# EAGLE board p8x-led-card-full (EAGLE 9.6.2)
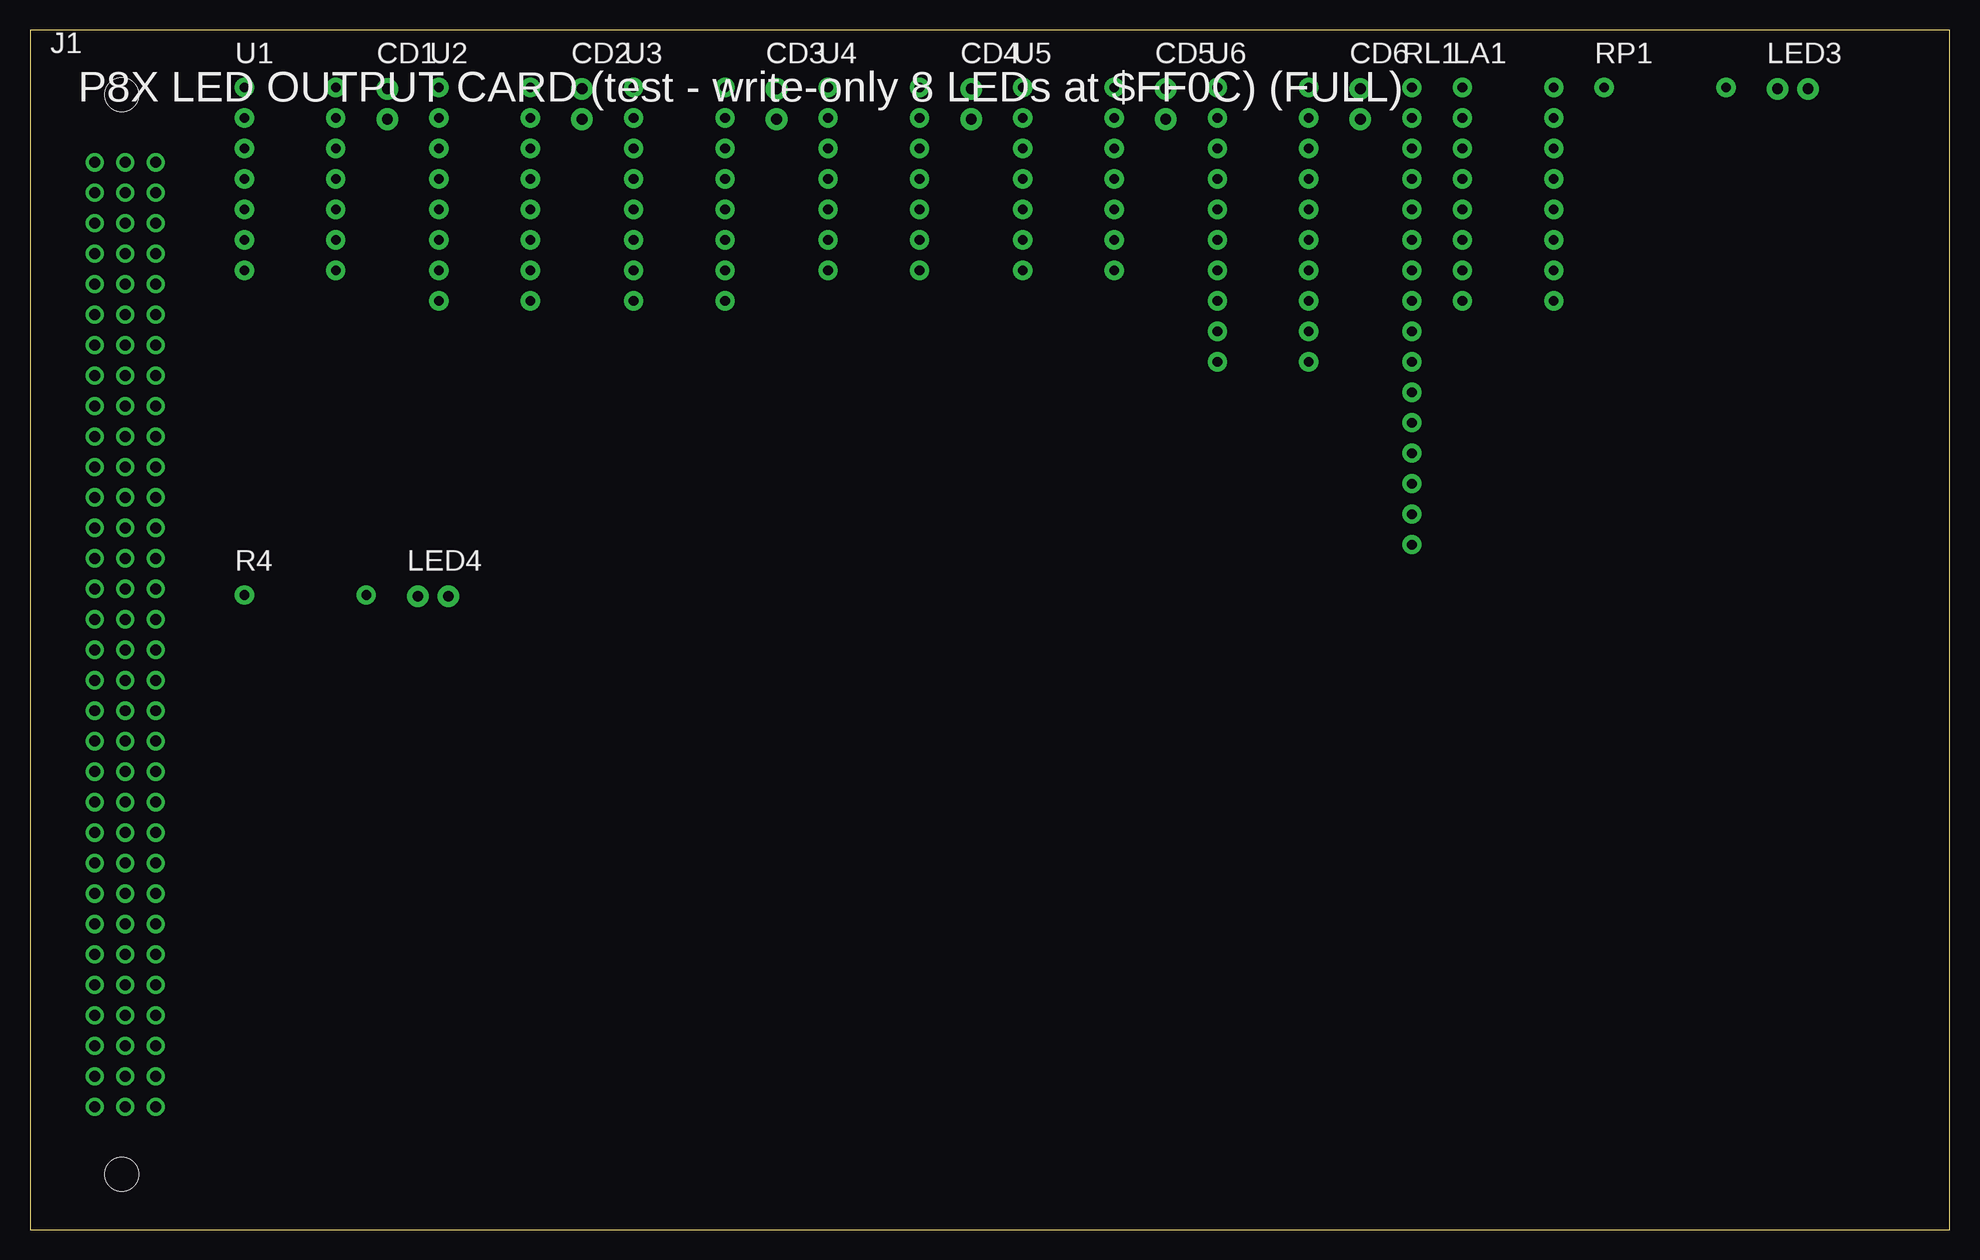
[diagram p0: board, top side]
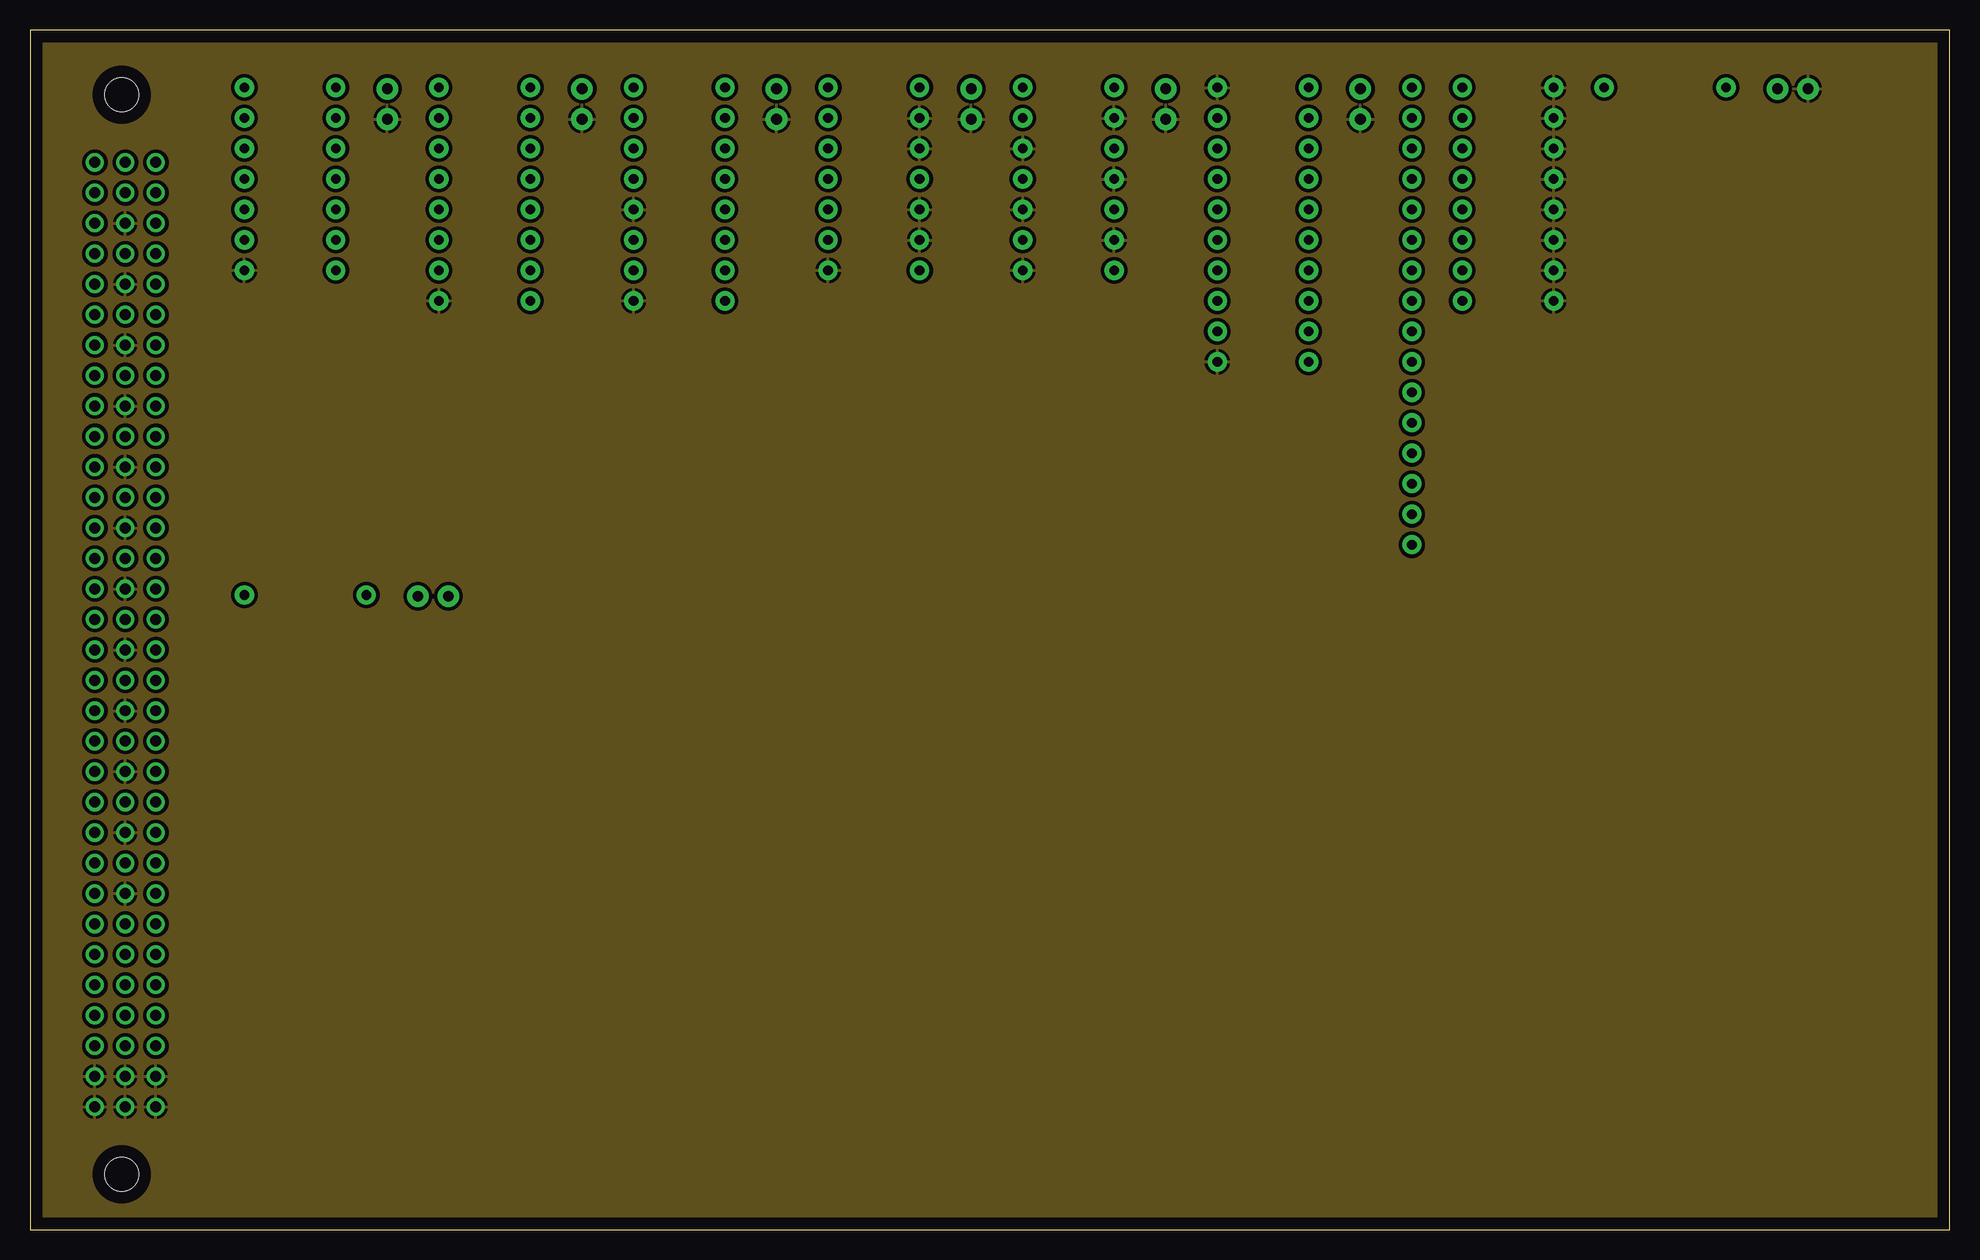
[diagram p1: board, inner layer Route2]
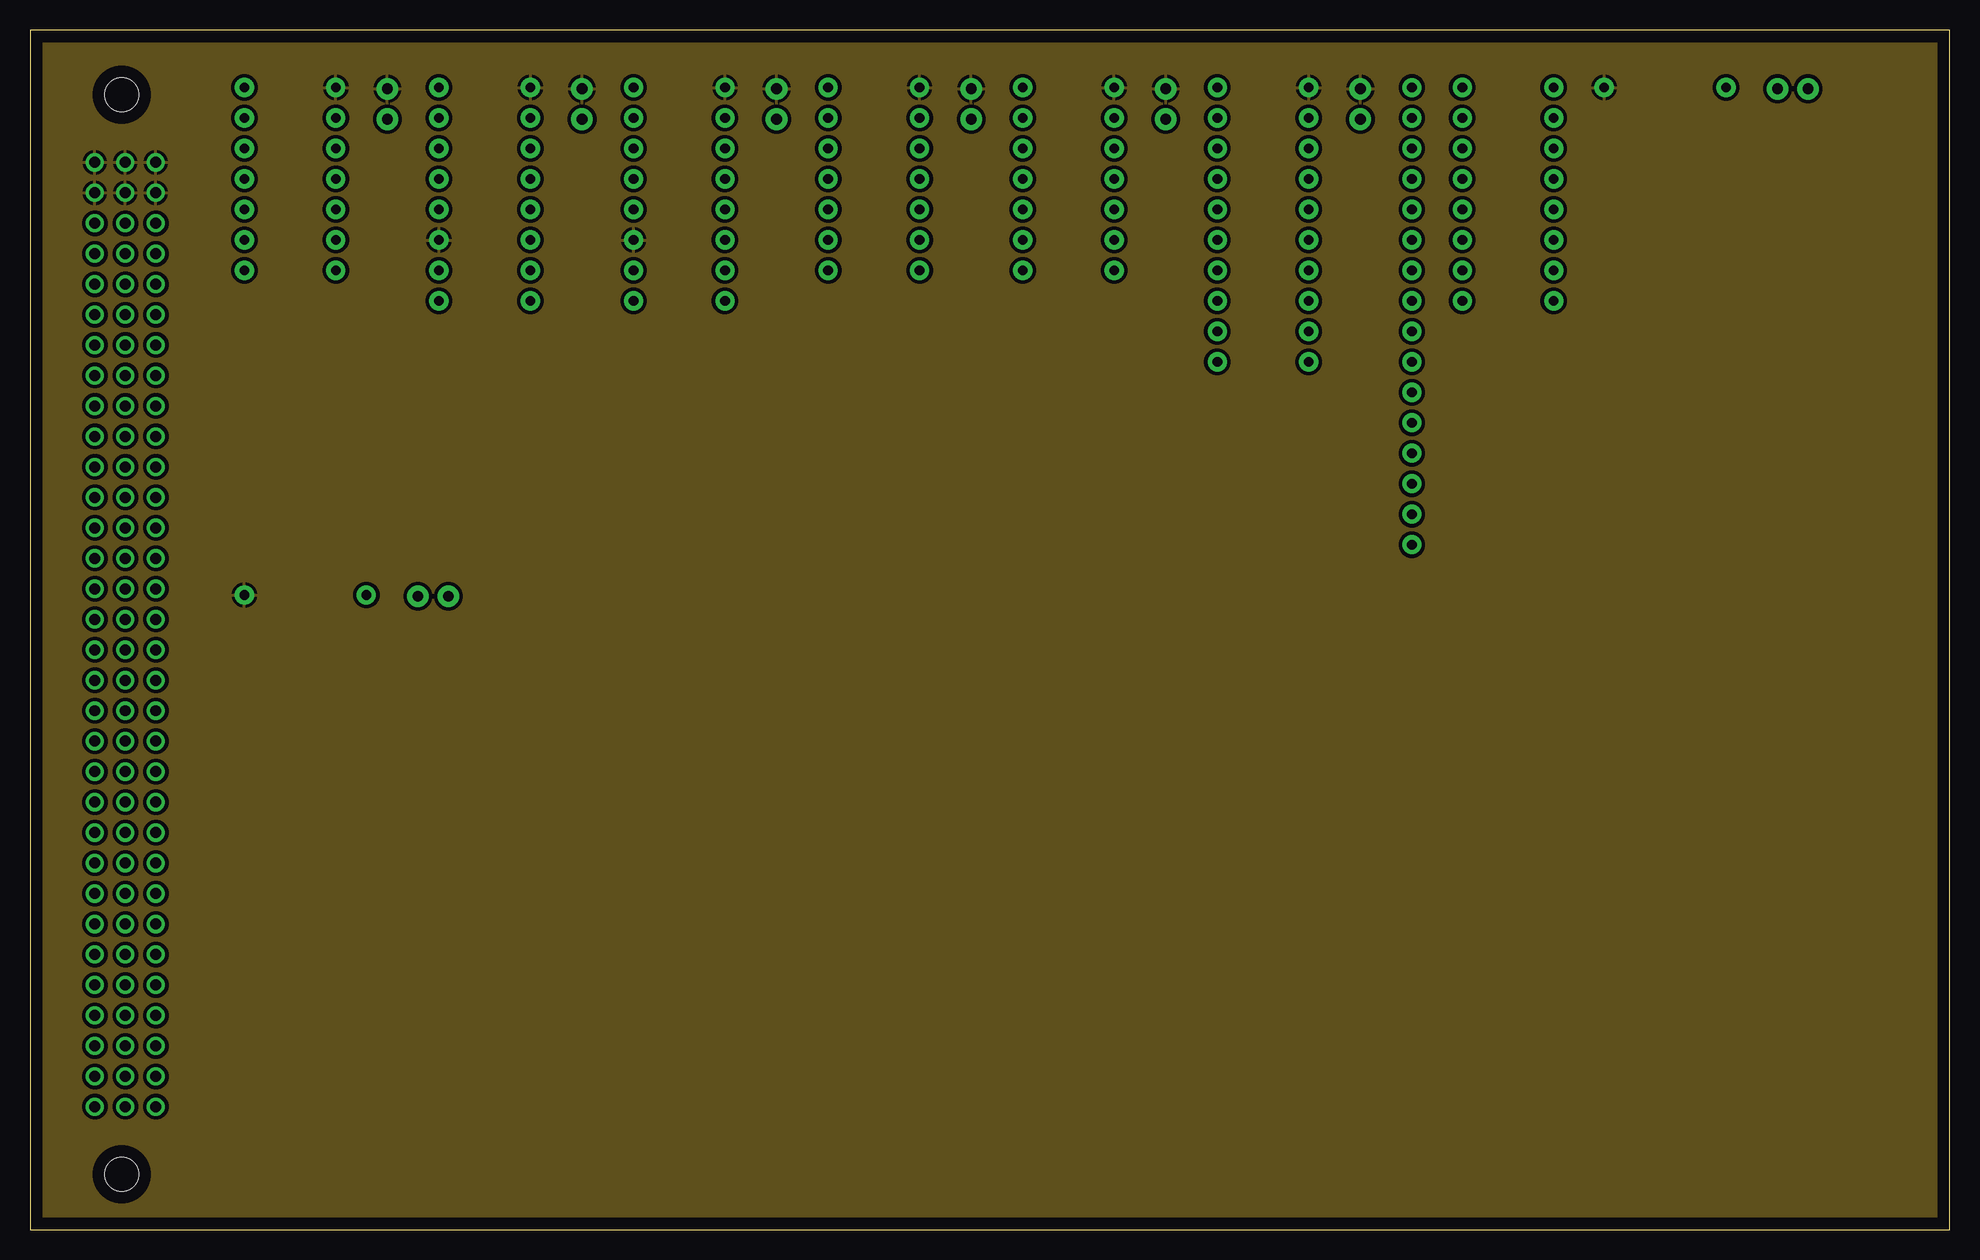
[diagram p2: board, inner layer Route15]

Size 160 x 100 mm. Coordinates in mm from the lower left corner, seen from the top.
Outline: 0,0 160,0 160,100 0,100 0,0
Copper layers (1*2*15*16): Top / Route2 / Route15 / Bottom

## Footprints (pad centres in the part's own frame; a part is rotated, then mirrored left to right if it is on the bottom)
C_DISC1 = drill 0.9 pad 1.8: 1 0,0; 2 0,-2.54
MABC96R = drill 0.914 pad 1.524: A1 -2.54,39.37; A2 -2.54,36.83; A3 -2.54,34.29; A4 -2.54,31.75; A5 -2.54,29.21; A6 -2.54,26.67; A7 -2.54,24.13; A8 -2.54,21.59; A9 -2.54,19.05; A10 -2.54,16.51; A11 -2.54,13.97; A12 -2.54,11.43; A13 -2.54,8.89; A14 -2.54,6.35; A15 -2.54,3.81; A16 -2.54,1.27; A17 -2.54,-1.27; A18 -2.54,-3.81; A19 -2.54,-6.35; A20 -2.54,-8.89; A21 -2.54,-11.43; A22 -2.54,-13.97; A23 -2.54,-16.51; A24 -2.54,-19.05; A25 -2.54,-21.59; A26 -2.54,-24.13; A27 -2.54,-26.67; A28 -2.54,-29.21; A29 -2.54,-31.75; A30 -2.54,-34.29; A31 -2.54,-36.83; A32 -2.54,-39.37; B1 0,39.37; B2 0,36.83; B3 0,34.29; B4 0,31.75; B5 0,29.21; B6 0,26.67; B7 0,24.13; B8 0,21.59; B9 0,19.05; B10 0,16.51; B11 0,13.97; B12 0,11.43; B13 0,8.89; B14 0,6.35; B15 0,3.81; B16 0,1.27; B17 0,-1.27; B18 0,-3.81; B19 0,-6.35; B20 0,-8.89; B21 0,-11.43; B22 0,-13.97; B23 0,-16.51; B24 0,-19.05; B25 0,-21.59; B26 0,-24.13; B27 0,-26.67; B28 0,-29.21; B29 0,-31.75; B30 0,-34.29; B31 0,-36.83; B32 0,-39.37; C1 2.54,39.37; C2 2.54,36.83; C3 2.54,34.29; C4 2.54,31.75; C5 2.54,29.21; C6 2.54,26.67; C7 2.54,24.13; C8 2.54,21.59; C9 2.54,19.05; C10 2.54,16.51; C11 2.54,13.97; C12 2.54,11.43; C13 2.54,8.89; C14 2.54,6.35; C15 2.54,3.81; C16 2.54,1.27; C17 2.54,-1.27; C18 2.54,-3.81; C19 2.54,-6.35; C20 2.54,-8.89; C21 2.54,-11.43; C22 2.54,-13.97; C23 2.54,-16.51; C24 2.54,-19.05; C25 2.54,-21.59; C26 2.54,-24.13; C27 2.54,-26.67; C28 2.54,-29.21; C29 2.54,-31.75; C30 2.54,-34.29; C31 2.54,-36.83; C32 2.54,-39.37 | hole 2.794: -0.3,45; -0.3,-45
DIP16 = drill 0.813 pad 1.6: 1 0,0; 2 0,-2.54; 3 0,-5.08; 4 0,-7.62; 5 0,-10.16; 6 0,-12.7; 7 0,-15.24; 8 0,-17.78; 9 7.62,-17.78; 10 7.62,-15.24; 11 7.62,-12.7; 12 7.62,-10.16; 13 7.62,-7.62; 14 7.62,-5.08; 15 7.62,-2.54; 16 7.62,0
LED5 = drill 0.9 pad 1.8: 1 2.54,0; 2 0,0
R_AXIAL = drill 0.8 pad 1.6: 1 0,0; 2 10.16,0
SIP16 = drill 0.8 pad 1.6: 1 0,-2.54; 2 0,-5.08; 3 0,-7.62; 4 0,-10.16; 5 0,-12.7; 6 0,-15.24; 7 0,-17.78; 8 0,-20.32; 9 0,-22.86; 10 0,-25.4; 11 0,-27.94; 12 0,-30.48; 13 0,-33.02; 14 0,-35.56; 15 0,-38.1; 16 0,-40.64
DIP14 = drill 0.813 pad 1.6: 1 0,0; 2 0,-2.54; 3 0,-5.08; 4 0,-7.62; 5 0,-10.16; 6 0,-12.7; 7 0,-15.24; 8 7.62,-15.24; 9 7.62,-12.7; 10 7.62,-10.16; 11 7.62,-7.62; 12 7.62,-5.08; 13 7.62,-2.54; 14 7.62,0
DIP20 = drill 0.813 pad 1.6: 1 0,0; 2 0,-2.54; 3 0,-5.08; 4 0,-7.62; 5 0,-10.16; 6 0,-12.7; 7 0,-15.24; 8 0,-17.78; 9 0,-20.32; 10 0,-22.86; 11 7.62,-22.86; 12 7.62,-20.32; 13 7.62,-17.78; 14 7.62,-15.24; 15 7.62,-12.7; 16 7.62,-10.16; 17 7.62,-7.62; 18 7.62,-5.08; 19 7.62,-2.54; 20 7.62,0

## Placement (x,y rotation side)
CD1  100nF  [C_DISC1]  29.79,95.1 0 top
CD2  100nF  [C_DISC1]  46.01,95.1 0 top
CD3  100nF  [C_DISC1]  62.23,95.1 0 top
CD4  100nF  [C_DISC1]  78.45,95.1 0 top
CD5  100nF  [C_DISC1]  94.67,95.1 0 top
CD6  100nF  [C_DISC1]  110.89,95.1 0 top
J1  MABC96R  [MABC96R]  7.94,49.6 0 top
LA1  8-LED BAR  [DIP16]  119.39,95.2 0 top
LED3  GRN  [LED5]  145.67,95.1 0 top
LED4  YEL  [LED5]  32.33,52.8 0 top
R4  1K  [R_AXIAL]  17.87,52.9 0 top
RL1  8x330R  [SIP16]  115.19,97.74 0 top
RP1  1K  [R_AXIAL]  131.21,95.2 0 top
U1  74HCT30  [DIP14]  17.87,95.2 0 top
U2  74HCT138  [DIP16]  34.09,95.2 0 top
U3  74HCT138  [DIP16]  50.31,95.2 0 top
U4  74HCT32  [DIP14]  66.53,95.2 0 top
U5  74HCT14  [DIP14]  82.75,95.2 0 top
U6  74HCT374  [DIP20]  98.97,95.2 0 top

## Library data of the parts
CD1-CD6 J1 LA1 LED3 LED4 R4 RL1 RP1 U1-U6 = p8x

## Nets
-MEMW: U3.7 U4.2
-SEL: U2.9 U4.1
A1: J1.C4 U2.1
A2: J1.C5 U2.2
A3: J1.C6 U2.3
A4: J1.C7 U2.5
A8: J1.C11 U1.1
A9: J1.C12 U1.2
A10: J1.C13 U1.3
A11: J1.C14 U1.4
A12: J1.C15 U1.5
A13: J1.C16 U1.6
A14: J1.C17 U1.11
A15: J1.C18 U1.12
CLKB: J1.A25 U5.1
CLKBN: U4.5 U5.2
D0: J1.A3 U6.3
D1: J1.A4 U6.4
D2: J1.A5 U6.7
D3: J1.A6 U6.8
D4: J1.A7 U6.13
D5: J1.A8 U6.14
D6: J1.A9 U6.17
D7: J1.A10 U6.18
DLD0: J1.A16 U3.1
DLD1: J1.A17 U3.2
DLD2: J1.A18 U3.3
DLD3: J1.A19 U3.4
GND: CD1.2 CD2.2 CD3.2 CD4.2 CD5.2 CD6.2 J1.A31 J1.A32 J1.B3 J1.B5 J1.B7 J1.B9 J1.B11 J1.B13 J1.B15 J1.B17 J1.B19 J1.B21 J1.B23 J1.B25 J1.B31 J1.B32 J1.C31 J1.C32 LA1.9 LA1.10 LA1.11 LA1.12 LA1.13 LA1.14 LA1.15 LA1.16 LED3.1 U1.7 U2.8 U3.5 U3.8 U4.7 U4.9 U4.10 U4.12 U4.13 U5.3 U5.5 U5.7 U5.9 U5.11 U5.13 U6.1 U6.10
IOPG: U1.8 U2.4
LCK: U4.6 U6.11
LEDP: LED3.2 RP1.2
LEDWR: LED4.2 R4.2
LP0: RL1.1 U6.2
LP1: RL1.3 U6.5
LP2: RL1.5 U6.6
LP3: RL1.7 U6.9
LP4: RL1.9 U6.12
LP5: RL1.11 U6.15
LP6: RL1.13 U6.16
LP7: RL1.15 U6.19
LR0: LA1.1 RL1.2
LR1: LA1.2 RL1.4
LR2: LA1.3 RL1.6
LR3: LA1.4 RL1.8
LR4: LA1.5 RL1.10
LR5: LA1.6 RL1.12
LR6: LA1.7 RL1.14
LR7: LA1.8 RL1.16
VCC: CD1.1 CD2.1 CD3.1 CD4.1 CD5.1 CD6.1 J1.A1 J1.A2 J1.B1 J1.B2 J1.C1 J1.C2 R4.1 RP1.1 U1.14 U2.6 U2.16 U3.6 U3.16 U4.14 U5.14 U6.20
WRSEL: LED4.1 U4.3 U4.4

## Tracks (layer width: path | path; a pad name or v marks a point on that pad's centre or on a via)
GND
  pour Route2 (isolate 0.3): 0,0 160,0 160,100 0,100
VCC
  pour Route15 (isolate 0.3): 0,0 160,0 160,100 0,100

## Text on the board
tPlace: P8X LED OUTPUT CARD (test - write-only 8 LEDs at $FF0C) (FULL)